# Altium PCB UPCNSL-ABS-FLS-POL_test-v1.0.1.PcbDoc
Units mm, origin at the board's own origin, x right, y up, seen from the top; angles counter-clockwise.
Board outline 109.22 x 119.38 mm, 2 copper layers (Top Layer, Bottom Layer); 142 components, 166 nets, 559 pads, 53 vias.
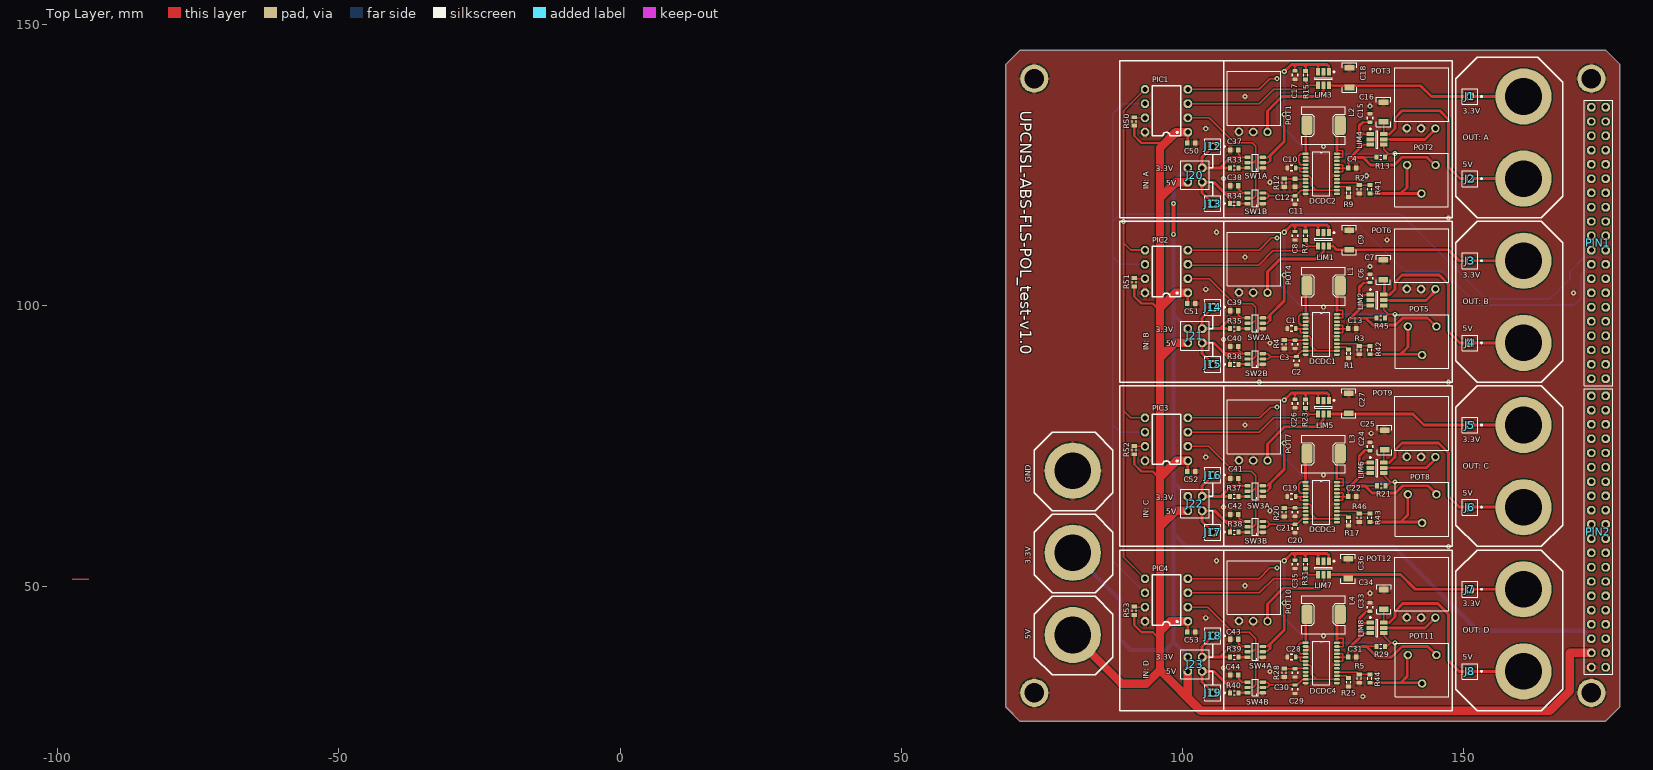
[diagram p0: Top Layer view]
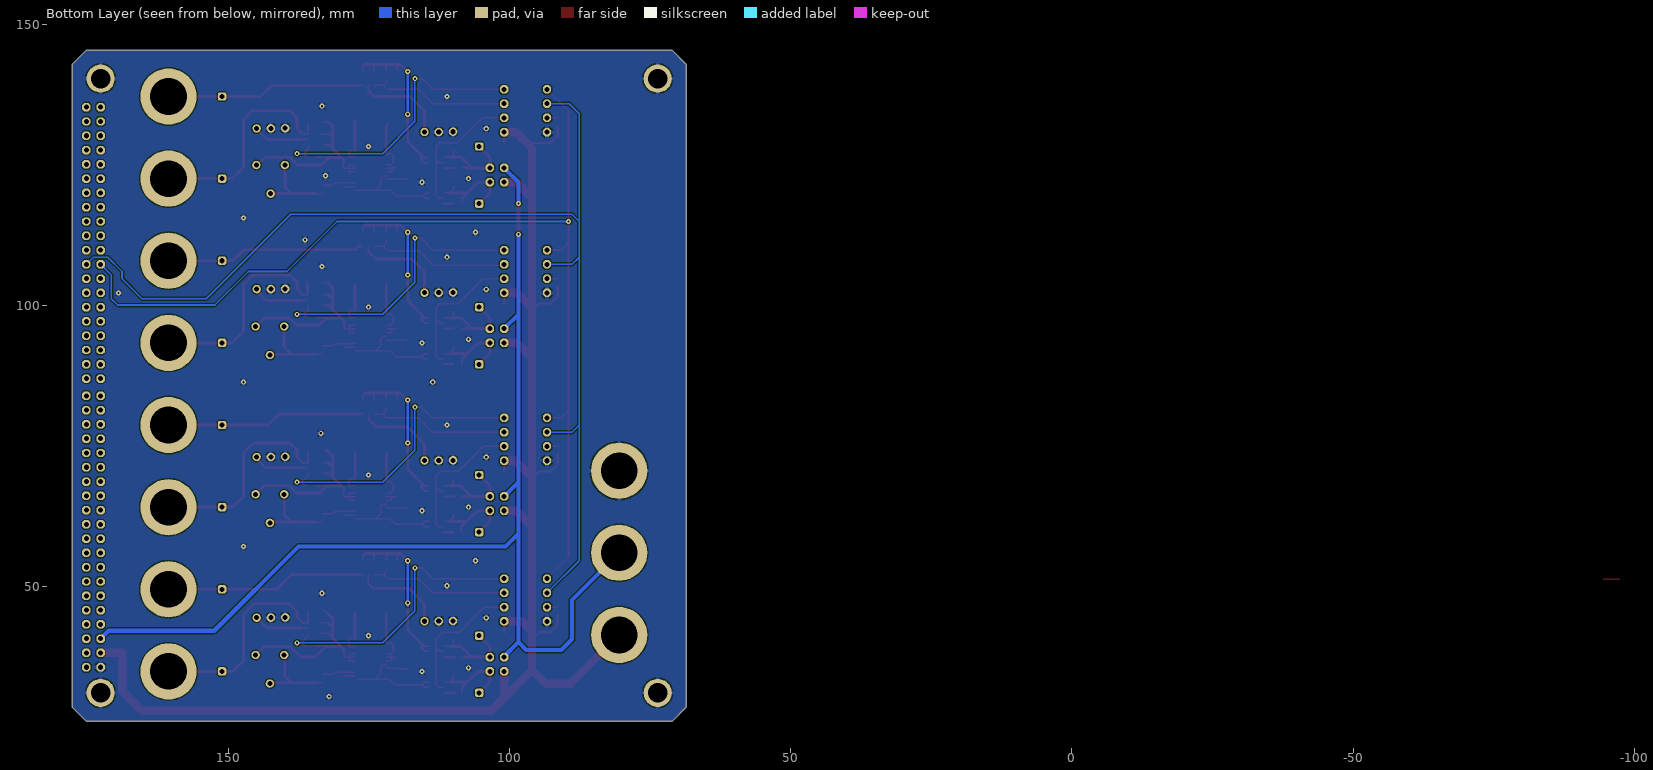
[diagram p1: Bottom Layer view, seen from below]

## Layer stack, top to bottom
Top Solder: solder mask 0.0102, Solder Resist, Dk 3.5
Top Layer: signal copper 0.0356
Dielectric 1: dielectric 0.32, FR-4, Dk 4.8
Bottom Layer: signal copper 0.0356
Bottom Solder: solder mask 0.0102, Solder Resist, Dk 3.5

## Board outline
68.58,28.575 71.12,26.035 175.26,26.035 177.8,28.575 177.8,142.875 175.26,145.415 71.12,145.415 68.58,142.875

## Design rules (kind name [scope] priority, off if disabled: settings)
Clearance Clearance_GND [InNamedPolygon('GND')] p1: gap=0.5
Clearance [All] p2: gap=0.2
PlaneConnect [All] p1: planeconnectstyle=Relief reliefexpansion=0.508 reliefentries=4 reliefconductorwidth=0.75 reliefairgap=0.254
PolygonConnect [All] p1: connectstyle=Relief reliefconductorwidth=0.75 reliefentries=4 polygonreliefangle="90 Angle" airgapwidth=0.254
RoutingVias [All] p1: holewidth=0.711 width=1.27 viastyle="Through Hole" minholewidth=0.711 minwidth=1.27 maxholewidth=0.711 maxwidth=1.27
SolderMaskExpansion [All] p1: expansion=0.102
UnpouredPolygon [All] p1: allowunpoured=FALSE
Width [All] p1: maxlimit=10 minlimit=0.2 preferedwidth=0.2
28 further rules are at their usual default settings.

## Components (designator, comment, footprint, x,y, rotation, side; value= is the part's Value field where it differs from the comment)
C1 "CAP0603" CAP0603 119.38,95.885 r180 top
C2 "CAP0603" CAP0603 120.269,90.17 r270 top
C3 "CAP0603" CAP0603 120.015,93.091 r270 top
C4 "Cap Semi" 1608[0603] 130.175,124.46 r180 top
C6 "CAP0603" CAP0603 133.388,104.825 r90 top
C7 "CAP1206" CAP1206W 135.75,106.35 r90 top
C8 "CAP0603" CAP0603 120.015,112.395 r270 top
C9 "CAP1206" CAP1206W 129.67,111.65 r90 top
C10 "CAP0603" CAP0603 119.38,124.46 r180 top
C11 "CAP0603" CAP0603 120.015,118.745 r270 top
C12 "Cap Semi" 1608[0603] 120.015,121.793 r90 top
C13 "Cap Semi" 1608[0603] 130.175,95.885 r180 top
C15 "CAP0603" CAP0603 133.35,133.35 r90 top
C16 "CAP1206" CAP1206W 135.76,134.41 r90 top
C17 "CAP0603" CAP0603 120.015,140.97 r270 top
C18 "CAP1206" CAP1206W 129.71,140.52 r90 top
C19 "CAP0603" CAP0603 119.38,66.04 r180 top
C20 "CAP0603" CAP0603 120.015,60.325 r270 top
C21 "CAP0603" CAP0603 120.015,63.246 r270 top
C22 "Cap Semi" 1608[0603] 130.175,66.04 r180 top
C24 "CAP0603" CAP0603 133.35,74.93 r90 top
C25 "CAP1206" CAP1206W 135.95,76.08 r90 top
C26 "CAP0603" CAP0603 120.015,82.55 r270 top
C27 "CAP1206" CAP1206W 129.56,82.61 r90 top
C28 "CAP0603" CAP0603 119.38,37.465 r180 top
C29 "CAP0603" CAP0603 120.015,31.75 r270 top
C30 "CAP0603" CAP0603 120.015,34.671 r270 top
C31 "Cap Semi" 1608[0603] 130.175,37.465 r180 top
C33 "CAP0603" CAP0603 133.35,46.355 r90 top
C34 "CAP1206" CAP1206W 135.84,47.75 r90 top
C35 "CAP0603" CAP0603 120.015,53.975 r270 top
C36 "CAP1206" CAP1206W 129.46,53.19 r90 top
C37 "Cap Semi" 1608[0603] 109.22,127.635 r0 top
C38 "Cap Semi" 1608[0603] 109.22,121.285 r0 top
C39 "Cap Semi" 1608[0603] 109.22,99.06 r0 top
C40 "Cap Semi" 1608[0603] 109.22,92.71 r0 top
C41 "Cap Semi" 1608[0603] 109.22,69.215 r180 top
C42 "Cap Semi" 1608[0603] 109.22,62.865 r180 top
C43 "Cap Semi" 1608[0603] 109.22,40.64 r0 top
C44 "Cap Semi" 1608[0603] 109.22,34.29 r0 top
C50 "Cap Semi" 1608[0603] 101.6,128.905 r0 top
C51 "Cap Semi" 1608[0603] 101.6,100.33 r0 top
C52 "Cap Semi" 1608[0603] 101.6,70.485 r0 top
C53 "Cap Semi" 1608[0603] 101.6,41.91 r0 top
DCDC1 "LTC3128" SOP-24 121.92,98.425 r0 top
DCDC2 "LTC3128" SOP-24 121.92,127 r0 top
DCDC3 "LTC3128" SOP-24 121.92,68.58 r0 top
DCDC4 "LTC3128" SOP-24 121.92,40.005 r0 top
J1 "Socket" PIN1 151.13,137.16 r270 top
J2 "Socket" PIN1 151.13,122.555 r270 top
J3 "Socket" PIN1 151.13,107.95 r270 top
J4 "Socket" PIN1 151.13,93.345 r270 top
J5 "Socket" PIN1 151.13,78.74 r270 top
J6 "Socket" PIN1 151.13,64.135 r270 top
J7 "Socket" PIN1 151.13,49.53 r270 top
J8 "Socket" PIN1 151.13,34.925 r270 top
J12 "Socket" PIN1 105.41,128.27 r270 top
J13 "Socket" PIN1 105.41,118.11 r270 top
J14 "Socket" PIN1 105.41,99.695 r270 top
J15 "Socket" PIN1 105.41,89.535 r270 top
J16 "Socket" PIN1 105.41,69.85 r270 top
J17 "Socket" PIN1 105.41,59.69 r270 top
J18 "Socket" PIN1 105.41,41.275 r270 top
J19 "Socket" PIN1 105.41,31.115 r270 top
J20 "Header 2X2" HDR2X2 100.965,124.46 r270 top
J21 "Header 2X2" HDR2X2 100.965,95.885 r270 top
J22 "Header 2X2" HDR2X2 100.965,66.04 r270 top
J23 "Header 2X2" HDR2X2 100.965,37.465 r270 top
L1 "Inductor" MPLC0703R3 121.158,100.076 r0 top
L2 "Inductor" MPLC0703R3 121.158,128.651 r0 top
L3 "Inductor" MPLC0703R3 121.158,70.231 r0 top
L4 "Inductor" MPLC0703R3 121.158,41.656 r0 top
LIM1 "MIC2039" SOT23-6_M 125.095,111.76 r270 top
LIM2 "MIC2039" SOT23-6_M 134.62,100.965 r0 top
LIM3 "MIC2039" SOT23-6_M 125.095,140.335 r270 top
LIM4 "MIC2039" SOT23-6_M 134.62,129.54 r0 top
LIM5 "MIC2039" SOT23-6_M 125.095,81.915 r270 top
LIM6 "MIC2039" SOT23-6_M 134.62,71.12 r0 top
LIM7 "MIC2039" SOT23-6_M 125.095,53.34 r270 top
LIM8 "MIC2039" SOT23-6_M 134.62,42.672 r0 top
PIC1 "SOCOL-8P" SOCOL-8P 97.155,134.62 r180 top
PIC2 "SOCOL-8P" SOCOL-8P 97.155,106.045 r180 top
PIC3 "SOCOL-8P" SOCOL-8P 97.155,76.2 r180 top
PIC4 "SOCOL-8P" SOCOL-8P 97.155,47.625 r180 top
PIN1 "Header 20X2" HDR2X20 172.72,135.255 r270 top
PIN2 "Header 20X2" HDR2X20 172.72,83.93 r270 top
POT1 "POT" POT 107.95,132.08 r0 top
POT2 "POT" POT2 137.414,117.348 r0 top
POT3 "POT" POT 137.795,132.715 r0 top
POT4 "POT" POT 107.95,103.505 r0 top
POT5 "POT" POT2 137.541,88.646 r0 top
POT6 "POT" POT 137.795,104.14 r0 top
POT7 "POT" POT 107.95,73.66 r0 top
POT8 "POT" POT2 137.541,58.801 r0 top
POT9 "POT" POT 137.795,74.295 r0 top
POT10 "POT" POT 107.95,45.085 r0 top
POT11 "POT" POT2 137.541,30.226 r0 top
POT12 "POT" POT 137.795,45.72 r0 top
R1 "Res3" J1-0603 129.54,91.44 r90 top
R2 "Res3" J1-0603 131.445,120.65 r90 top
R3 "Res3" J1-0603 131.445,92.075 r90 top
R4 "Res3" J1-0603 118.11,93.091 r90 top
R5 "Res3" J1-0603 131.445,33.655 r90 top
R7 "Res3" J1-0603 121.92,112.395 r90 top
R9 "Res3" J1-0603 129.54,120.015 r90 top
R12 "Res3" J1-0603 118.11,121.793 r90 top
R13 "Res3" J1-0603 135.255,126.365 r180 top
R15 "Res3" J1-0603 121.92,140.97 r90 top
R17 "Res3" J1-0603 129.54,61.595 r90 top
R20 "Res3" J1-0603 118.11,63.246 r90 top
R21 "Res3" J1-0603 135.37,67.945 r180 top
R23 "Res3" J1-0603 121.92,82.55 r90 top
R25 "Res3" J1-0603 129.54,33.02 r90 top
R28 "Res3" J1-0603 118.11,34.671 r90 top
R29 "Res3" J1-0603 135.255,39.37 r180 top
R31 "Res3" J1-0603 121.92,53.975 r90 top
R33 "Res3" J1-0603 109.22,124.46 r0 top
R34 "Res3" J1-0603 109.19,118.128 r180 top
R35 "Res3" J1-0603 109.22,95.885 r0 top
R36 "Res3" J1-0603 109.22,89.535 r180 top
R37 "Res3" J1-0603 109.22,66.04 r0 top
R38 "Res3" J1-0603 109.22,59.69 r180 top
R39 "Res3" J1-0603 109.22,37.465 r0 top
R40 "Res3" J1-0603 109.22,31.115 r180 top
R41 "Res3" J1-0603 133.35,120.65 r270 top
R42 "Res3" J1-0603 133.35,92.075 r270 top
R43 "Res3" J1-0603 133.35,62.23 r270 top
R44 "Res3" J1-0603 133.35,33.655 r270 top
R45 "Res3" J1-0603 135.255,97.79 r180 top
R46 "Res3" J1-0603 131.445,62.23 r90 top
R50 "Res3" J1-0603 91.44,132.715 r270 top
R51 "Res3" J1-0603 91.44,104.14 r270 top
R52 "Res3" J1-0603 91.44,74.295 r270 top
R53 "Res3" J1-0603 91.44,45.72 r270 top
SW1A "TPS27082L" TPS27081A 114.3,124.46 r90 top
SW1B "TPS27082L" TPS27081A 114.3,118.11 r90 top
SW2A "TPS27082L" TPS27081A 114.3,95.885 r90 top
SW2B "TPS27082L" TPS27081A 114.3,89.535 r90 top
SW3A "TPS27082L" TPS27081A 114.3,66.04 r90 top
SW3B "TPS27082L" TPS27081A 114.3,59.69 r90 top
SW4A "TPS27082L" TPS27081A 114.3,37.465 r90 top
SW4B "TPS27082L" TPS27081A 114.3,31.115 r90 top

## Footprints (in the part's own frame and the unit in brackets; to place one, negate y for a bottom-side part, rotate by r counter-clockwise, add the part's x,y. Pads: shape width x height; smd on the part's side, far side on the other; paste and mask are expansions set on the pad)
1608[0603] [mm] "Chip Capacitor, Body 1.6x0.8mm, IPC High Density"
  rect 0.8x0.9 smd: 1(-0.7,0) 2(0.7,0)
  body extent -0.87,-0.48 0.87,0.48, height 1.3
CAP0603 [mm] "Capacitor Chip Inductor, Body 0.6x0.3mm, IPC High Density"
  rrect50% 0.6x0.9 smd: 1(-0.75,0) 2(0.75,0)
  silkscreen extent -0.2,-0.5 0.2,0.5, body extent -0.76,-0.38 0.76,0.38, height 0.76
CAP1206W [mm] "capacitor 1206 wave soldering"
  rect 1x1.7 smd: 1(-1.75,0) 2(1.75,0)
  silkscreen extent -2.6,-1.27 2.6,1.27, body extent -1.6,-0.8 1.6,0.8, height 1
HDR2X2 [mm] "Connector; Header; 2x2 Position"
  oct 1.5x1.5 hole 0.9: 1(0,0) 2(0,2.54) 3(2.54,0) 4(2.54,2.54)
  silkscreen extent -1.27,-1.27 3.81,3.81
HDR2X20 [mm] "Connector; Header; 20x2 Position"
  oct 1.5x1.5 hole 0.9: 1(0,0) 2(0,2.54) 3(2.54,0) 4(2.54,2.54) 5(5.08,0) 6(5.08,2.54) 7(7.62,0) 8(7.62,2.54) 9(10.16,0) 10(10.16,2.54) 11(12.7,0) 12(12.7,2.54) 13(15.24,0) 14(15.24,2.54) 15(17.78,0) 16(17.78,2.54) 17(20.32,0) 18(20.32,2.54) 19(22.86,0) 20(22.86,2.54) 21(25.4,0) 22(25.4,2.54) 23(27.94,0) 24(27.94,2.54) 25(30.48,0) 26(30.48,2.54) 27(33.02,0) 28(33.02,2.54) 29(35.56,0) 30(35.56,2.54) 31(38.1,0) 32(38.1,2.54) 33(40.64,0) 34(40.64,2.54) 35(43.18,0) 36(43.18,2.54) 37(45.72,0) 38(45.72,2.54) 39(48.26,0) 40(48.26,2.54)
  silkscreen extent -1.27,-1.27 49.53,3.81
J1-0603 [mm] "Chip Resistor, Body 1.6x0.8mm, IPC High Density"
  rect 0.7x0.9 smd: 1(-0.75,0) 2(0.75,0)
  silkscreen extent -0.2,-0.35 0.2,0.35, body extent -0.85,-0.48 0.85,0.48, height 0.9
MPLC0703R3 [mm] "INDUCTOR, High power"
  rrect50% 2x3.5 smd: 1(1,3.407) 2(6.9,3.407)
  silkscreen extent 0.07,0 7.82,6.7
PIN1 [mm] "Connector; Plug"
  rrect50% 1.5x1.5 hole 0.9: 1(0,0)
  silkscreen extent -1.4,-1.4 1.4,2.18
POT [mm]
  round 1.5 hole 0.9: 1(7.18,-1.238) 2(4.651,-1.233) 3(2.104,-1.194)
  silkscreen extent 0,0 9.53,9.53
POT2 [mm]
  round 1.5 hole 0.9: 1(7.62,7.62) 2(5.08,2.54) 3(2.54,7.62)
  silkscreen extent 0.32,0.2 9.85,9.73
SOCOL-8P [mm]
  oct 1.5x1.5 hole 0.9: 1(-3.81,3.81) 2(-3.81,1.27) 3(-3.81,-1.27) 4(-3.81,-3.81) 5(3.81,-3.81) 6(3.81,-1.27) 7(3.81,1.27) 8(3.81,3.81)
  silkscreen extent -2.54,-4.48 2.54,4.48
SOP-24 [mm]
  rect 1.05x0.45 smd: 1(0,0)
  oval 1.05x0.45 smd: 2(0,-0.65) 3(0,-1.3) 4(0,-1.95) 5(0,-2.6) 6(0,-3.25) 7(0,-3.9) 8(0,-4.55) 9(0,-5.2) 10(0,-5.85) 11(0,-6.5) 12(0,-7.15) 13(5.55,-7.15) 14(5.55,-6.5) 15(5.55,-5.85) 16(5.55,-5.2) 17(5.55,-4.55) 18(5.55,-3.9) 19(5.55,-3.25) 20(5.55,-2.6) 21(5.55,-1.95) 22(5.55,-1.3) 23(5.55,-0.65) 24(5.55,0)
  rrect50% 2.74x3.25 on Top Solder: 2(2.775,-3.575)
  silkscreen extent 1.26,-7.48 4.29,0.33
SOT23-6_M [mm] "SOT23, 6-Leads, Body 2.9x1.6mm, Pitch 0.95mm, Lead Span 2.7mm, IPC Low Density"
  rect 1.3x0.7 smd: 1(-1.2,0.95) 2(-1.2,0) 3(-1.2,-0.95) 4(1.2,-0.95) 5(1.2,0) 6(1.2,0.95)
  silkscreen extent -1.32,-1.55 0.15,1.98, body extent -0.9,-1.55 0.9,1.55, height 1.45
TPS27081A [mm] "POL"
  rrect50% 0.6x1.1 smd: 1(0,0) 2(0.95,0) 3(1.9,0) 4(1.9,2.7) 5(0.95,2.7) 6(0,2.7)
  silkscreen extent -0.55,0.85 2.45,1.85

## Part data
C1 C2 C3 C6 C8 C10 C11 C15 C17 C19 C20 C21 C24 C26 C28 C29 C30 C33 C35: "Capacitor"
C4 C12 C13 C22 C31 C37 C38 C39 C40 C41 C42 C43 C44 C50 C51 C52 C53: "Capacitor (Semiconductor SIM Model)"
C7 C9 C16 C18 C25 C27 C34 C36: library part CAP0603, "Capacitor"
DCDC1 DCDC2 DCDC3 DCDC4: library part Component_1
J20 J21 J22 J23: "Header, 2-Pin, Dual row"
PIN1 PIN2: "Header, 20-Pin, Dual row"
POT1 POT2 POT3 POT4 POT5 POT6 POT7 POT8 POT9 POT10 POT11 POT12: library part component_1
R1 R2 R3 R4 R5 R7 R9 R12 R13 R15 R17 R20 R21 R23 R25 R28 R29 R31 R33 R34 R35 R36 R37 R38 R39 R40 R41 R42 R43 R44 R45 R46 R50 R51 R52 R53: "Resistor"

## Free pads (board coordinates)
  round 10 hole 6.5: 24(160.655,137.16) 25(160.655,122.555) 26(160.655,107.95) 27(160.655,93.345) 28(160.655,78.74) 29(160.655,64.135) 30(160.655,49.53) 31(160.655,34.925) 32(80.518,41.402) 33(80.518,56.007) 34(80.518,70.612)
  round 5 hole 3.5: ""(73.66,31.115) ""(73.66,140.335) ""(172.72,31.115) ""(172.72,140.335)

## Via types
v1: diameter 0.91/0.91 (per signal layer), hole 0.4, Top Layer to Bottom Layer, 53 vias

## Nets (pads, with @x,y where several pads share a name; then routed paths per layer and width w, separated by ;. In a path a pad name is that pad's centre, name@x,y a point inside that pad or via, vN(x,y) a via of type N, cw(c..) or ccw(c..) an arc to the next point about the centre after c; other vN are vias at no path point)
A0: PIN2.31
A1: PIN2.32
A2: PIN2.29
A3: PIN2.30
A4: PIN2.27
A5: PIN2.28
A6: PIN2.25
A7: PIN2.26
A8: PIN2.23
A9: PIN2.24
A10: PIN2.21
A11: PIN2.22
A12: PIN2.19
A13: PIN2.20
A14: PIN2.17
A15: PIN2.18
AREF: PIN1.1
COMM0_RX0: PIN1.16
COMM1_TX0: PIN1.15
COMM14_TX3: PIN1.17
COMM15_RX3: PIN1.18
COMM16_TX2: PIN1.19
COMM17_RX2: PIN1.20
COMM18_TX1: PIN1.21
COMM19_RX1: PIN1.22
COMM20_SDA: PIC1.5 PIC2.5 PIC3.5 PIC4.5 PIN1.23 | length 193.6
  Top Layer w0.3: 89.535,81.28 90.805,80.01 PIC3.5 ; 89.535,111.125 90.805,109.855 PIC2.5 ; PIC4.5 89.535,55.245 89.535,134.62 PIC1.5
  Bottom Layer w0.3: v1(89.535,114.935) 130.695,114.935 139.585,106.045 146.431,106.045 152.4,100.076 169.672,100.076 170.815,101.219 170.815,105.41 PIN1.23
COMM21_SCL: PIC1.6 PIC2.6 PIC3.6 PIC4.6 PIN1.24 | length 205.2
  Bottom Layer w0.3: 87.63,114.935 88.9,116.205 138.938,116.205 153.924,101.219 165.354,101.219 168.91,104.775 168.91,106.045 171.45,108.585 173.99,108.585 PIN1.24 ; PIC4.6 87.63,54.61 87.63,78.74 ; PIC3.6 88.9,77.47 87.63,78.74 ; PIC2.6 88.9,107.315 87.63,108.585 ; PIC1.6 89.408,135.89 87.63,134.112 87.63,108.585 ; 87.63,78.74 87.63,108.585
D22: PIN1.25
D23: PIN1.26
D24: PIN1.27
D25: PIN1.28
D26: PIN1.29
D27: PIN1.30
D28: PIN1.31
D29: PIN1.32
D30: PIN1.33
D31: PIN1.34
D32: PIN1.35
D33: PIN1.36
D34: PIN1.37
D35: PIN1.38
D36: PIN1.39
D37: PIN1.40
D38: PIN2.1
D39: PIN2.2
D40: PIN2.3
D41: PIN2.4
D42: PIN2.5
D43: PIN2.6
D44: PIN2.7
D45: PIN2.8
D46: PIN2.9
D47: PIN2.10
D48: PIN2.11
D49: PIN2.12
ENABLE1: PIC1.2 SW1A.5 SW1B.5 | length 26.1
  Top Layer w0.254: PIC1.2 104.775,133.35 109.22,128.905 112.395,128.905 113.03,128.27 113.03,125.857 ; SW1A.5 112.583,125.41 113.03,125.857 ; SW1B.5@111.697,119.078 112.601,119.078 113.03,119.507 113.03,125.857
ENABLE2: PIC2.2 SW2A.5 SW2B.5 | length 26.1
  Top Layer w0.254: PIC2.2 104.775,104.775 109.22,100.33 112.395,100.33 113.03,99.695 113.03,97.409 ; SW2A.5 112.456,96.835 113.03,97.409 ; SW2B.5@111.697,90.503 112.601,90.503 113.03,90.932 113.03,97.409
ENABLE3: PIC3.2 SW3A.5 SW3B.5 | length 26
  Top Layer w0.254: PIC3.2 104.648,74.93 109.093,70.485 112.268,70.485 113.03,69.723 113.03,67.564 ; SW3A.5 112.456,66.99 113.03,67.564 ; SW3B.5@111.697,60.658 112.601,60.658 113.03,61.087 113.03,67.564
ENABLE4: PIC4.2 SW4A.5 SW4B.5 | length 25.8
  Top Layer w0.254: PIC4.2 104.521,46.355 108.966,41.91 111.887,41.91 113.03,40.767 113.03,38.989 ; SW4A.5@111.6,38.481 112.522,38.481 113.03,38.989 ; SW4B.5@111.697,32.083 112.601,32.083 113.03,32.512 113.03,38.989
GND: C1.2 C2.2 C3.2 C4.1 C6.2 C7.2 C8.2 C9.2 C10.2 C11.2 C12.1 C13.1 C15.2 C16.2 C17.2 C18.2 C19.2 C20.2 C21.2 C22.1 C24.2 C25.2 C26.2 C27.2 C28.2 C29.2 C30.2 C31.1 C33.2 C34.2 C35.2 C36.2 C37.1 C38.1 C39.1 C40.1 C41.2 C42.2 C43.1 C44.1 C50.2 C51.2 C52.2 C53.2 DCDC1.2@121.92,97.775 DCDC1.3 DCDC1.12 DCDC1.18 DCDC2.2@121.92,126.35 DCDC2.3 DCDC2.12 DCDC2.18 DCDC3.2@121.92,67.93 DCDC3.3 DCDC3.12 DCDC3.18 DCDC4.2@121.92,39.355 DCDC4.3 DCDC4.12 DCDC4.18 LIM1.2 LIM2.2 LIM3.2 LIM4.2 LIM5.2 LIM6.2 LIM7.2 LIM8.2 pad. pad.34 PIC1.8 PIC2.8 PIC3.8 PIC4.8 PIN2.39 POT1.2 POT1.3 POT3.2 POT3.3 POT4.2 POT4.3 POT6.2 POT6.3 POT7.2 POT7.3 POT9.2 POT9.3 POT10.2 POT10.3 POT12.2 POT12.3 R1.1 R2.1 R3.1 R4.1 R5.1 R9.1 R12.1 R17.1 R20.1 R25.1 R28.1 R46.1 SW1A.1 SW1B.1 SW2A.1 SW2B.1 SW3A.1 SW3B.1 SW4A.1 SW4B.1
  other v1: 132.08,30.48 115.57,34.925 107.315,35.56 125.095,41.275 104.14,44.45 133.34,48.82 111.125,50.165 106.045,54.61 147.32,57.15 115.57,63.5 107.315,64.135 125.095,69.85 104.14,73.025 133.56,77.26 111.125,78.74 113.665,86.36 147.32,86.36 115.57,93.345 107.315,93.98 125.095,99.695 169.545,102.235 104.14,102.87 133.34,106.92 111.125,108.585 136.37,111.67 106.045,113.03 147.32,115.57 115.57,121.92 107.315,122.555 132.715,123.063 125.095,128.27 104.14,131.445 133.34,135.44 111.125,137.16
IN-A_3.3V: C37.2 J12.1 J20.2 R33.1 SW1A.4 | length 16.4
  Top Layer w0.254: 107.696,124.46 R33.1 ; C37.2 109.92,126.935 110.495,126.36 SW1A.4
  Top Layer w0.5: J12.1@105.151,128.011 103.505,126.365 J20.2 107.696,124.46 ; 106.68,124.46 108.58,126.36 110.495,126.36
IN-A_5V: C38.2 J13.1 J20.4 R34.2 SW1B.4 | length 17.3
  Top Layer w0.254: R34.2 108.44,119.107 ; C38.2 109.92,120.712 110.617,120.015 110.622,120.01 SW1B.4
  Top Layer w0.5: J13.1 103.505,120.015 J20.4 105.627,121.92 107.532,120.015 ; 108.421,119.126 107.532,120.015 ; 110.617,120.015 107.532,120.015
IN-B_3.3V: C39.2 J14.1 J21.2 R35.1 SW2A.4 | length 16.4
  Top Layer w0.254: 107.696,95.885 R35.1 ; C39.2 109.92,98.36 110.495,97.785 SW2A.4
  Top Layer w0.5: J14.1@105.151,99.436 103.505,97.79 J21.2 107.696,95.885 ; 106.68,95.885 108.58,97.785 110.495,97.785
IN-B_5V: C40.2 J15.1 J21.4 R36.2 SW2B.4 | length 17.3
  Top Layer w0.254: R36.2@108.44,89.553 108.44,90.532 ; C40.2 109.92,92.137 110.617,91.44 110.622,91.435 SW2B.4
  Top Layer w0.5: J15.1 103.505,91.44 J21.4 105.627,93.345 107.532,91.44 ; 108.421,90.551 107.532,91.44 ; 110.617,91.44 107.532,91.44
IN-C_3.3V: C41.1 J16.1 J22.2 R37.1 SW3A.4 | length 16.4
  Top Layer w0.254: 107.823,66.04 R37.1@108.597,66.04 ; C41.1@110.047,69.215 110.047,68.515 110.622,67.94 SW3A.4@111.727,67.94
  Top Layer w0.5: J22.2 103.505,67.945 J16.1@105.151,69.591 ; J22.2@103.632,66.04 107.823,66.04 ; 106.807,66.04 108.707,67.94 110.622,67.94
IN-C_5V: C42.1 J17.1 J22.4 R38.2 SW3B.4 | length 17.3
  Top Layer w0.254: R38.2@108.567,59.708 108.567,60.687 ; C42.1@110.047,62.865 110.047,62.292 110.744,61.595 110.749,61.59 SW3B.4@111.727,61.59
  Top Layer w0.5: J22.4 103.505,61.595 J17.1 ; J22.4@103.632,63.5 105.754,63.5 107.659,61.595 ; 108.548,60.706 107.659,61.595 ; 110.744,61.595 107.659,61.595
IN-D_3.3V: C43.2 J18.1 J23.2 R39.1 SW4A.4 | length 16.4
  Top Layer w0.254: 107.696,37.465 R39.1 ; C43.2 109.92,39.94 110.495,39.365 SW4A.4
  Top Layer w0.5: J18.1@105.151,41.016 103.505,39.37 J23.2 107.696,37.465 ; 106.68,37.465 108.58,39.365 110.495,39.365
IN-D_5V: C44.2 J19.1 J23.4 R40.2 SW4B.4 | length 17.3
  Top Layer w0.254: R40.2@108.44,31.133 108.44,32.112 ; C44.2 109.92,33.717 110.617,33.02 110.622,33.015 SW4B.4
  Top Layer w0.5: J19.1 103.505,33.02 J23.4 105.627,34.925 107.532,33.02 ; 108.421,32.131 107.532,33.02 ; 110.617,33.02 107.532,33.02
IN_3.3V: J20.1 J21.1 J22.1 J23.1 pad.33 PIN2.35 | length 208
  Top Layer w0.75: v1(98.425,112.649) v1(98.425,118.11)
  Bottom Layer w0.75: pad.33 88.9,47.625 88.9,40.64 90.805,38.735 97.028,38.735 98.425,40.132 ; 98.425,59.436 100.711,57.15 137.541,57.15 152.527,42.164 171.306,42.164 PIN2.35 ; 98.425,68.58 J22.1 ; 98.425,98.425 J21.1 ; v1(98.425,112.649) 98.425,40.132 ; v1(98.425,118.11) 98.425,121.92 J20.1 ; J23.1@101.028,37.529 98.425,40.132
IN_5V: C50.1 C51.1 C52.1 C53.1 J20.3 J21.3 J22.3 J23.3 pad.32 PIC1.1 PIC2.1 PIC3.1 PIC4.1 PIN2.37 R50.2 R51.2 R52.2 R53.2 | length 288.3
  Top Layer w0.254: C50.1@100.965,128.97 C50.1@101.03,128.905
  Top Layer w0.4: R53.2 91.44,43.18 92.71,41.91 94.742,41.91 96.012,40.64 ; R52.2 91.44,71.755 92.71,70.485 94.742,70.485 96.012,69.215 ; R51.2 91.44,101.6 92.71,100.33 94.742,100.33 96.012,99.06 ; R50.2@91.44,131.838 91.44,130.175 92.71,128.905 96.901,128.905 ; C53.1@100.965,41.848 PIC4.1@100.965,43.688 ; C52.1@100.965,70.423 PIC3.1@100.965,72.263 ; C51.1@100.965,100.268 PIC2.1 ; C50.1@100.965,128.97 PIC1.1
  Top Layer w1.5: pad.32@84.391,41.402 pad.32 89.154,32.766 93.599,32.766 96.012,35.179 ; 96.012,42.037 97.79,43.815 PIC4.1 ; 96.012,99.568 98.679,102.235 PIC2.1 ; 96.012,119.126 98.806,121.92 J20.3 ; 96.075,60.77 98.806,63.5 J22.3 ; 96.075,69.532 98.933,72.39 PIC3.1 ; 96.393,91.059 98.679,93.345 J21.3 ; 100.965,30.226 J23.3@100.965,34.798 ; PIC1.1 98.806,130.81 96.012,128.016 96.012,35.179 ; PIN2.37@172.71,38.22 168.91,38.22 168.91,31.496 165.354,27.94 103.251,27.94 96.012,35.179
IOREF0: PIN2.34
IOREF1: PIN2.36
LU1A: LIM3.4 PIC1.3 R15.1 | length 25.8
  Top Layer w0.254: PIC1.3 113.665,135.89 116.205,138.43 121.793,138.43 122.492,139.129 121.92,139.7 R15.1 ; 122.498,139.135 LIM3.4
LU1B: LIM4.4 PIC1.4 R13.1 | length 51.8
  Top Layer w0.254: PIC1.4 113.665,138.43 115.57,140.335 v1(116.84,140.335) ; LIM4.4@135.42,128.32 LIM4.4@135.547,128.447 ; LIM4.4 135.82,127.82 136.64,127 ; R13.1 136.64,127 ; v1(137.795,127) 136.64,127
  Bottom Layer w0.254: v1(116.84,140.335) 116.84,132.715 122.555,127 v1(137.795,127)
LU2A: LIM1.4 PIC2.3 R7.1 | length 26
  Top Layer w0.254: PIC2.3@100.838,107.188 113.538,107.188 116.078,109.728 121.666,109.728 122.047,110.109 122.061,110.109 122.498,110.547 121.92,111.125 R7.1 ; 122.498,110.56 LIM1.4
LU2B: LIM2.4 PIC2.4 R45.1 | length 51.9
  Top Layer w0.254: PIC2.4 113.665,109.855 115.824,112.014 v1(116.84,112.014) ; LIM2.4 135.82,99.245 136.64,98.425 ; R45.1 136.64,98.425 ; v1(137.795,98.425) 136.64,98.425
  Bottom Layer w0.254: v1(116.84,112.014) 116.84,104.14 122.555,98.425 v1(137.795,98.425)
LU3A: LIM5.4 PIC3.3 R23.1 | length 25.9
  Top Layer w0.254: PIC3.3 113.665,77.47 116.205,80.01 121.92,80.01 122.568,80.658 LIM5.4@124.124,80.658 ; R23.1 121.92,81.28 122.555,80.645
LU3B: LIM6.4 PIC3.4 R21.1 | length 51.7
  Top Layer w0.254: PIC3.4 113.792,80.01 115.697,81.915 v1(116.84,81.915) ; LIM6.4@135.89,70.17 135.89,69.723 137.033,68.58 ; R21.1@136.017,67.945 136.398,67.945 137.033,68.58 ; v1(137.795,68.58) 137.033,68.58
  Bottom Layer w0.254: v1(116.84,81.915) 116.84,74.295 122.555,68.58 v1(137.795,68.58)
LU4A: LIM7.4 PIC4.3 R31.1 | length 26
  Top Layer w0.254: PIC4.3@100.838,48.514 100.838,48.768 PIC4.3 113.665,48.895 116.205,51.435 121.666,51.435 122.364,52.133 121.92,52.578 R31.1@121.92,52.971 ; 122.364,52.14 LIM7.4
LU4B: LIM8.4 PIC4.4 R29.1 | length 51.7
  Top Layer w0.254: PIC4.4 113.665,51.435 115.57,53.34 v1(116.84,53.34) ; LIM8.4@135.89,41.595 135.89,41.148 137.033,40.005 ; R29.1@136.017,39.37 136.398,39.37 137.033,40.005 ; v1(137.795,40.005) 137.033,40.005
  Bottom Layer w0.254: v1(116.84,53.34) 116.84,45.72 122.555,40.005 v1(137.795,40.005)
MISO: PIN2.13
MOSI: PIN2.14
NetC1_1: C1.1 DCDC1.5 DCDC1.6 | length 3.4
  Top Layer w0.254: C1.1 120.146,95.869 120.95,95.869 ; DCDC1.5@121.876,95.869 120.95,95.869 ; DCDC1.6 120.955,95.175 120.95,95.17 120.95,95.869
NetC2_1: C2.1 DCDC1.7 DCDC1.11 DCDC1.14 SW2B.2 SW2B.3 | length 18.7
  Top Layer w0.254: SW2B.2@114.554,90.485 115.25,90.485 115.685,90.92 ; SW2B.3@114.554,91.435 115.17,91.435 115.685,90.92 ; C2.1@120.257,90.932 121.25,91.925 DCDC1.11 123.825,91.925 ; C2.1@120.372,90.92 115.685,90.92 ; DCDC1.7 122.518,94.525 122.936,94.107 122.936,92.814 123.825,91.925 ; DCDC1.14 123.825,91.925
NetC3_1: C3.1 DCDC1.8 R4.2 | length 3.8
  Top Layer w0.254: R4.2 C3.1 121.886,93.841 DCDC1.8
NetC4_2: C4.2 C15.1 DCDC2.19 DCDC2.20 DCDC2.21 LIM4.1 LIM4.3 POT2.1 R13.2 | length 39.4
  Top Layer w0.254: DCDC2.19 128.55,123.75 128.55,124.4 ; DCDC2.20 128.55,124.4 ; DCDC2.21 128.55,125.05 128.55,124.4 ; 129.54,125.476 129.54,124.525 C4.2 129.415,124.4 128.55,124.4 ; 132.08,128.574 LIM4.3@133.134,128.574 ; 132.08,130.479 LIM4.1@133.458,130.479 ; 132.08,132.588 133.163,132.588 C15.1@133.193,132.618 ; 132.157,126.288 132.234,126.365 R13.2
  Top Layer w0.5: 129.54,125.476 129.54,125.984 131.445,127.889 ; 129.921,126.288 132.157,126.288 133.477,124.968 137.668,124.968 139.065,126.365 143.471,126.365 POT2.1@145.072,124.764 ; 131.445,129.921 132.08,130.556 ; 132.08,128.524 131.445,127.889 ; 132.08,132.588 131.445,131.953 131.445,127.889
NetC6_1: C6.1 C13.2 DCDC1.19 DCDC1.20 DCDC1.21 LIM2.1 LIM2.3 POT5.1 R45.2 | length 39.7
  Top Layer w0.254: DCDC1.19 128.545,95.175 128.545,95.825 ; DCDC1.20 128.545,95.825 ; DCDC1.21 128.545,96.475 128.545,95.825 ; 129.413,96.901 129.413,95.947 129.291,95.825 128.545,95.825 ; 132.08,99.949 132.146,100.015 LIM2.3 ; 132.143,101.79 132.268,101.915 LIM2.1 ; 132.207,104.013 132.269,104.075 C6.1 ; 132.665,97.713 132.742,97.79 R45.2 ; LIM2.3@132.88,99.999 LIM2.3@133.261,99.999
  Top Layer w0.5: 129.413,96.901 129.413,97.282 129.844,97.713 ; 131.445,101.092 132.143,101.79 ; 132.08,99.949 131.445,99.314 ; 132.207,104.013 131.445,103.251 131.445,99.314 ; POT5.1@145.199,96.189 143.598,97.79 139.192,97.79 137.922,96.52 133.858,96.52 132.665,97.713 129.844,97.713 ; 129.844,97.713 131.445,99.314
NetC8_1: C8.1 LIM1.1 LIM1.3 R7.2 SW2A.2 SW2A.3 | length 33.5
  Top Layer w0.254: SW2A.2 115.062,96.835 115.062,96.852 115.57,97.36 ; SW2A.3 115.057,97.785 115.57,98.298 ; C8.1 120.015,113.919 ; R7.2 121.92,113.919 ; LIM1.3@124.124,112.903 124.124,113.964 ; LIM1.1@126.024,112.903 126.024,114.006
  Top Layer w0.5: 115.57,97.36 115.57,98.298 118.11,100.838 v1(118.11,105.41) ; v1(118.11,113.03) 119.38,114.3 119.634,114.3 ; 120.015,113.919 119.634,114.3 ; 121.92,113.919 121.539,114.3 ; 124.119,114.006 123.825,114.3 ; 126.024,114.006 125.73,114.3 123.825,114.3 ; 119.634,114.3 121.539,114.3 ; 121.539,114.3 123.825,114.3
  Bottom Layer w0.5: v1(118.11,105.41) v1(118.11,113.03)
NetC10_1: C10.1 DCDC2.5 DCDC2.6 | length 3.5
  Top Layer w0.254: C10.1 120.9,124.46 ; DCDC2.6 120.9,123.75 120.9,124.46 ; DCDC2.5 120.96,124.4 120.9,124.46
NetC11_1: C11.1 DCDC2.7 DCDC2.11 DCDC2.14 SW1B.2 SW1B.3 | length 18.8
  Top Layer w0.254: SW1B.2 114.996,119.06 115.431,119.495 ; SW1B.3 114.916,120.01 115.431,119.495 ; DCDC2.7 121.964,123.056 122.471,123.056 122.936,122.591 122.936,121.389 123.825,120.5 ; DCDC2.14 123.825,120.5 ; 115.431,119.495 120.13,119.495 121.135,120.5 DCDC2.11 123.825,120.5
NetC12_2: C12.2 DCDC2.8 R12.2 | length 3.7
  Top Layer w0.254: R12.2 C12.2@119.965,122.543 ; C12.2@120.058,122.45 DCDC2.8
NetC17_1: C17.1 LIM3.1 LIM3.3 R15.2 SW1A.2 SW1A.3 | length 33.2
  Top Layer w0.254: SW1A.2@114.465,125.24 114.635,125.41 115.25,125.41 115.608,125.768 ; SW1A.3@114.541,126.492 114.795,126.238 115.082,126.238 115.481,126.637 ; C17.1 120.015,142.494 ; R15.2 121.92,142.494 ; LIM3.3@124.124,141.478 124.124,142.539 ; LIM3.1@126.024,141.478 126.024,142.581
  Top Layer w0.5: 115.608,125.768 115.608,126.657 118.11,129.159 v1(118.11,133.985) ; v1(118.11,141.605) 119.38,142.875 119.634,142.875 ; 120.015,142.494 119.634,142.875 ; 121.92,142.494 121.539,142.875 ; 124.119,142.581 123.825,142.875 ; 126.024,142.581 125.73,142.875 123.825,142.875 ; 119.634,142.875 121.539,142.875 ; 121.539,142.875 123.825,142.875
  Bottom Layer w0.5: v1(118.11,133.985) v1(118.11,141.605)
NetC19_1: C19.1 DCDC3.5 DCDC3.6 | length 3.4
  Top Layer w0.254: C19.1 120.19,65.98 120.99,65.98 ; DCDC3.6 121,65.33 120.99,65.34 120.99,65.98 ; DCDC3.5 120.99,65.98
NetC20_1: C20.1 DCDC3.7 DCDC3.11 DCDC3.14 SW3B.2 SW3B.3 | length 19.1
  Top Layer w0.254: SW3B.2 115.123,60.64 115.57,61.087 ; SW3B.3 115.067,61.59 115.57,61.087 ; DCDC3.7 121.964,64.636 122.689,64.636 122.936,64.389 122.936,62.969 123.825,62.08 ; DCDC3.14 123.825,62.08 ; 115.57,61.087 120.305,61.087 121.298,62.08 DCDC3.11 123.825,62.08
NetC21_1: C21.1 DCDC3.8 R20.2 | length 3.8
  Top Layer w0.254: R20.2 C21.1 DCDC3.8@121.886,63.996
NetC22_2: C22.2 C24.1 DCDC3.19 DCDC3.20 DCDC3.21 LIM6.1 LIM6.3 POT8.1 R21.2 | length 39.5
  Top Layer w0.254: DCDC3.19 128.55,65.33 128.55,65.97 ; DCDC3.20 128.56,65.98 ; DCDC3.21 127.51,66.67 128.54,66.67 ; 128.56,66.65 128.56,65.98 ; C22.2@129.415,65.98 128.56,65.98 ; C22.2 129.475,66.867 ; 132.08,70.104 132.146,70.17 LIM6.3 ; 132.143,71.945 132.268,72.07 LIM6.1 ; 132.452,74.25 C24.1@132.948,74.25 ; 132.518,67.888 132.575,67.945 R21.2 ; LIM6.3@132.88,70.154 LIM6.3@133.261,70.154
  Top Layer w0.5: 129.475,66.867 129.475,67.499 129.864,67.888 132.518,67.888 133.731,66.675 137.922,66.675 139.192,67.945 143.686,67.945 POT8.1@145.267,66.364 ; 129.882,67.906 131.445,69.469 ; 131.445,71.247 132.143,71.945 ; 132.08,70.104 131.445,69.469 ; 132.452,74.25 131.445,73.243 131.445,69.469
NetC26_1: C26.1 LIM5.1 LIM5.3 R23.2 SW3A.2 SW3A.3 | length 33.2
  Top Layer w0.254: SW3A.2 115.057,66.99 115.481,67.414 ; SW3A.3 115.057,67.94 115.481,68.364 ; C26.1 120.015,84.074 ; R23.2 121.92,84.074 ; LIM5.3@124.124,83.058 124.124,84.119 ; LIM5.1@126.024,83.058 126.024,84.161
  Top Layer w0.5: 115.57,67.564 115.57,68.326 118.11,70.866 v1(118.11,75.565) ; v1(118.11,83.185) 119.38,84.455 119.634,84.455 ; 120.015,84.074 119.634,84.455 ; 121.92,84.074 121.539,84.455 ; 124.119,84.161 123.825,84.455 ; 126.024,84.161 125.73,84.455 123.825,84.455 ; 119.634,84.455 121.539,84.455 ; 121.539,84.455 123.825,84.455
  Bottom Layer w0.5: v1(118.11,75.565) v1(118.11,83.185)
NetC28_1: C28.1 DCDC4.5 DCDC4.6 | length 3.5
  Top Layer w0.254: C28.1 120.19,37.405 120.92,37.405 ; DCDC4.6 120.935,36.755 120.92,36.77 120.92,37.405 ; DCDC4.5 120.92,37.405
NetC29_1: C29.1 DCDC4.7 DCDC4.11 DCDC4.14 SW4B.2 SW4B.3 | length 18.6
  Top Layer w0.254: SW4B.2 115.123,32.065 115.57,32.512 ; SW4B.3 115.067,33.015 115.57,32.512 ; DCDC4.7 121.964,36.061 122.689,36.061 122.936,35.814 122.936,34.417 123.848,33.505 126.97,33.505 DCDC4.14@127.014,33.461 ; 123.825,33.505 DCDC4.11 121.389,33.505 120.396,32.512 115.57,32.512
NetC30_1: C30.1 DCDC4.8 R28.2 | length 3.8
  Top Layer w0.254: R28.2 C30.1 120.049,35.455 DCDC4.8
NetC31_2: C31.2 C33.1 DCDC4.19 DCDC4.20 DCDC4.21 LIM8.1 LIM8.3 POT11.1 R29.2 | length 40
  Top Layer w0.254: DCDC4.19 128.545,36.755 128.55,36.75 128.55,37.405 ; DCDC4.20 128.55,37.405 ; DCDC4.21 127.495,38.08 128.54,38.08 128.55,38.07 128.55,37.405 ; 129.476,38.417 129.415,38.356 129.415,37.405 128.55,37.405 ; 132.207,41.656 132.273,41.722 LIM8.3@133.547,41.722 ; 132.27,43.497 132.395,43.622 LIM8.1@133.547,43.622 ; 132.334,45.212 132.727,45.605 C33.1 ; 132.715,39.37 R29.2 ; LIM8.3@133.007,41.706 LIM8.3@133.388,41.706
  Top Layer w0.5: 129.476,38.417 129.476,38.925 131.445,40.894 131.445,44.323 132.334,45.212 ; 129.921,39.37 132.715,39.37 134.62,37.465 137.16,37.465 139.065,39.37 143.637,39.37 145.072,37.935 POT11.1@145.072,37.642 ; 131.572,41.021 132.207,41.656 ; 131.572,42.799 132.27,43.497
NetC35_1: C35.1 LIM7.1 LIM7.3 R31.2 SW4A.2 SW4A.3 | length 34.1
  Top Layer w0.254: SW4A.2@114.3,38.476 115.057,38.476 115.57,38.989 ; SW4A.3 115.057,39.365 115.481,39.789 ; v1@118.199,54.521 v1(118.11,54.61) v1@118.225,54.725 ; C35.1 120.015,55.499 ; R31.2 121.92,55.499 ; LIM7.3@124.124,54.483 124.124,55.544 ; LIM7.1@126.024,54.483 126.024,55.586
  Top Layer w0.5: 115.57,38.989 115.57,39.751 118.11,42.291 v1(118.11,47.117) ; v1(118.11,54.61) 119.38,55.88 119.634,55.88 ; 120.015,55.499 119.634,55.88 ; 121.92,55.499 121.539,55.88 ; 124.119,55.586 123.825,55.88 ; 126.024,55.586 125.73,55.88 123.825,55.88 ; 119.634,55.88 121.539,55.88 ; 121.539,55.88 123.825,55.88
  Bottom Layer w0.5: 118.11,46.609 v1(118.11,47.117) v1(118.11,54.61)
NetDCDC1_1: DCDC1.1 DCDC1.4 L1.1 | length 9.3
  Top Layer w0.254: 121.368,96.519 121.876,96.519 DCDC1.4 ; 121.368,96.52 121.031,96.52 120.65,96.901 120.65,98.044 121.031,98.425 DCDC1.1 121.92,99.021
  Top Layer w0.5: 121.92,99.021 L1.1@121.92,103.707
NetDCDC1_15: DCDC1.15 R1.2 | length 2.2
  Top Layer w0.254: DCDC1.15 129.155,92.575 R1.2
NetDCDC1_16: DCDC1.16 R3.2 R42.1 | length 6
  Top Layer w0.254: DCDC1.16 131.045,93.225 R3.2 R42.1
NetDCDC1_23: DCDC1.23 DCDC1.24 L1.2 | length 9.4
  Top Layer w0.254: DCDC1.23 128.545,97.775 128.545,98.425 ; DCDC1.24 128.545,98.425 ; 127.508,99.098 127.555,99.145 128.545,99.145 128.545,98.425 ; L1.2@127.508,103.58 L1.2@127.715,103.787
  Top Layer w0.5: 127.508,99.098 L1.2@127.508,103.58
NetDCDC2_1: DCDC2.1 DCDC2.4 L2.1 | length 9.3
  Top Layer w0.254: DCDC2.4 121.076,125.05 120.65,125.476 120.65,126.619 121.031,127 DCDC2.1 121.92,127.635
  Top Layer w0.5: L2.1@121.666,132.155 121.92,131.901 121.92,127.635
NetDCDC2_15: DCDC2.15 R9.2 | length 2.2
  Top Layer w0.254: DCDC2.15 129.155,121.15 R9.2
NetDCDC2_16: DCDC2.16 R2.2 R41.1 | length 6
  Top Layer w0.254: DCDC2.16 131.045,121.8 R2.2 R41.1
NetDCDC2_23: DCDC2.23 DCDC2.24 L2.2 | length 9.8
  Top Layer w0.254: 127.461,127.56 128.55,127.55 128.55,127 ; DCDC2.23 128.55,126.35 128.55,127 ; DCDC2.24 128.55,127
  Top Layer w0.5: 127.461,127.56 L2.2@127.461,132.87
NetDCDC3_1: DCDC3.1 DCDC3.4 L3.1 | length 9.1
  Top Layer w0.254: 121.861,69.215 121.861,68.639 121.09,68.639 120.65,68.199 120.65,67.056 121.076,66.63 DCDC3.4
  Top Layer w0.5: 121.861,69.215 L3.1@121.861,73.755
NetDCDC3_15: DCDC3.15 R17.2 | length 2.2
  Top Layer w0.254: DCDC3.15 129.155,62.73 R17.2
NetDCDC3_16: DCDC3.16 R43.1 R46.2 | length 6
  Top Layer w0.254: DCDC3.16 131.045,63.38 R46.2 R43.1
NetDCDC3_23: DCDC3.23 DCDC3.24 L3.2 | length 9.6
  Top Layer w0.254: L3.2@127.449,73.628 L3.2@127.783,73.962 ; 127.454,69.21 128.61,69.21 128.63,69.19 128.63,68.62 128.63,67.92 ; DCDC3.23 128.62,67.93 ; DCDC3.24 128.59,68.58
  Top Layer w0.5: 127.449,69.215 L3.2@127.449,73.628
NetDCDC4_1: DCDC4.1 DCDC4.4 L4.1 | length 9
  Top Layer w0.254: DCDC4.4 121.076,38.055 120.65,38.481 120.65,39.624 121.031,40.005 DCDC4.1 121.92,40.64
  Top Layer w0.5: 121.92,40.64 L4.1@121.92,45.033
NetDCDC4_15: DCDC4.15 R25.2 | length 2.2
  Top Layer w0.254: DCDC4.15 129.155,34.155 R25.2
NetDCDC4_16: DCDC4.16 R5.2 R44.1 | length 6
  Top Layer w0.254: DCDC4.16 131.045,34.805 R5.2 R44.1
NetDCDC4_23: DCDC4.23 DCDC4.24 L4.2 | length 9.8
  Top Layer w0.254: DCDC4.23 128.635,39.355 128.64,39.35 128.64,39.99 ; DCDC4.24 128.625,40.005 128.64,39.99 ; 127.47,40.64 127.61,40.78 128.66,40.78 128.64,40.76 128.64,39.99
  Top Layer w0.5: L4.2@127.461,45.367 127.462,45.062 127.47,40.64
NetLIM1_5: LIM1.5 POT4.1 | length 16.1
  Top Layer w0.254: 125.095,109.613 LIM1.5
  Top Layer w0.5: POT4.1@115.549,102.444 115.13,102.863 115.13,105.986 117.398,108.254 123.736,108.254 125.095,109.613
NetLIM2_5: LIM2.5 POT6.1 | length 9.9
  Top Layer w0.254: LIM2.5@135.985,100.888 136.944,100.888
  Top Layer w0.5: 136.944,100.888 143.33,100.888 POT6.1@145.14,102.698
NetLIM3_5: LIM3.5 POT1.1 | length 16.4
  Top Layer w0.254: LIM3.5@124.879,139.312 125.095,139.096 125.095,138.176
  Top Layer w0.5: POT1.1 115.13,134.561 117.729,137.16 124.079,137.16 125.095,138.176
NetLIM4_5: LIM4.5 POT3.1 | length 9.9
  Top Layer w0.254: LIM4.5 136.906,129.54
  Top Layer w0.5: 136.906,129.54 143.165,129.54 POT3.1@144.975,131.35
NetLIM5_5: LIM5.5 POT7.1 | length 15.6
  Top Layer w0.254: 125.074,79.735 LIM5.5@125.074,80.658
  Top Layer w0.5: POT7.1 115.13,75.379 118.18,78.429 123.768,78.429 125.074,79.735
NetLIM6_5: LIM6.5 POT9.1 | length 9.9
  Top Layer w0.254: LIM6.5@136.112,71.158 137.071,71.158
  Top Layer w0.5: 137.071,71.158 143.457,71.158 POT9.1@145.267,72.968
NetLIM7_5: LIM7.5 POT10.1 | length 16.2
  Top Layer w0.254: 125.076,50.527 125.095,50.546 LIM7.5
  Top Layer w0.5: POT10.1@115.422,43.897 115.13,44.189 115.13,46.931 117.906,49.707 124.256,49.707 125.076,50.527
NetLIM8_5: LIM8.5 POT12.1 | length 9.8
  Top Layer w0.254: LIM8.5 136.906,42.672
  Top Layer w0.5: 136.906,42.672 143.153,42.672 POT12.1@144.886,44.405
NetPIC1_7: PIC1.7 R50.1 | length 2
  Top Layer w0.254: R50.1 91.555,133.35 PIC1.7
NetPIC2_7: PIC2.7 R51.1 | length 2
  Top Layer w0.254: R51.1 91.555,104.775 PIC2.7
NetPIC3_7: PIC3.7 R52.1 | length 2
  Top Layer w0.254: R52.1 91.555,74.93 PIC3.7
NetPIC4_7: PIC4.7 R53.1 | length 2
  Top Layer w0.254: R53.1 91.555,46.355 PIC4.7
NetPOT2_2: POT2.2 POT2.3 R41.2 | length 14.9
  Top Layer w0.254: R41.2 134.505,119.9
  Top Layer w0.5: 134.505,119.9 142.343,119.9 POT2.2@142.464,119.779 ; 138.811,119.888 139.924,121.001 POT2.3@139.924,124.859 ; POT2.3@139.827,124.508 POT2.3@140.051,124.732
NetPOT5_2: POT5.2 POT5.3 R42.2 | length 14.6
  Top Layer w0.254: R42.2 134.505,91.325
  Top Layer w0.5: 134.62,91.325 142.482,91.325 POT5.2 ; 138.823,91.325 140.119,92.621 POT5.3@140.119,96.189
NetPOT8_2: POT8.2 POT8.3 R43.2 | length 14.4
  Top Layer w0.254: R43.2 134.505,61.48
  Top Layer w0.5: 134.62,61.468 142.062,61.468 POT8.2@142.405,61.125 ; 138.811,61.468 140.081,62.738 140.081,65.989 POT8.3@139.865,66.205
NetPOT11_2: POT11.2 POT11.3 R44.2 | length 14.5
  Top Layer w0.254: R44.2 134.505,32.905
  Top Layer w0.5: 134.505,32.905 142.189,32.905 POT11.2@142.532,32.562 ; 138.88,32.962 139.992,34.074 POT11.3@139.992,37.642
NetR33_2: R33.2 SW1A.6 | length 1.8
  Top Layer w0.4: R33.2@109.843,124.46 SW1A.6
NetR34_1: R34.1 SW1B.6 | length 1.8
  Top Layer w0.4: R34.1 SW1B.6@111.697,118.128
NetR35_2: R35.2 SW2A.6 | length 1.7
  Top Layer w0.4: R35.2@109.949,95.885 SW2A.6
NetR36_1: R36.1 SW2B.6 | length 1.8
  Top Layer w0.4: R36.1@110.008,89.585 SW2B.6@111.765,89.585
NetR37_2: R37.2 SW3A.6 | length 1.8
  Top Layer w0.4: R37.2@109.843,66.04 SW3A.6
NetR38_1: R38.1 SW3B.6 | length 1.8
  Top Layer w0.4: R38.1 SW3B.6@111.727,59.69
NetR39_2: R39.2 SW4A.6 | length 1.8
  Top Layer w0.4: R39.2@109.843,37.465 SW4A.6
NetR40_1: R40.1 SW4B.6 | length 1.8
  Top Layer w0.4: R40.1@109.843,31.115 SW4B.6
OUT-A_3.3V: C18.1 J1.1 LIM3.6 pad.24 | length 35.3
  Top Layer w0.254: LIM3.6 126.746,139.135
  Top Layer w0.5: 126.873,139.065 142.367,139.065 144.272,137.16 pad.24
OUT-A_5V: C16.1 J2.1 LIM4.6 pad.25 | length 39.8
  Top Layer w0.254: C16.1@135.86,132.618 135.82,132.578 LIM4.6 136.84,130.49
  Top Layer w0.5: 136.84,130.49 137.795,131.445 137.795,133.35 139.065,134.62 145.796,134.62 147.32,133.096 147.32,124.587 149.352,122.555 pad.25
OUT-B_3.3V: C9.1 J3.1 LIM1.6 pad.26 | length 35.7
  Top Layer w0.254: LIM1.6 126.746,110.56
  Top Layer w0.5: 126.746,110.56 127.406,109.9 147.275,109.9 149.225,107.95 pad.26
OUT-B_5V: C7.1 J4.1 LIM2.6 pad.27 | length 39.2
  Top Layer w0.254: LIM2.6 136.84,101.915
  Top Layer w0.3: LIM2.6@135.928,101.838 135.928,102.539 ; 135.928,103.555 135.928,104.075
  Top Layer w0.5: 135.928,102.539 135.928,103.555 ; 136.84,101.915 137.795,102.87 137.795,104.14 139.065,105.41 145.669,105.41 147.32,103.759 147.32,95.377 149.352,93.345 pad.27
OUT-C_3.3V: C27.1 J5.1 LIM5.6 pad.28 | length 35.4
  Top Layer w0.254: LIM5.6 126.746,80.715
  Top Layer w0.5: 126.746,80.715 128.835,80.715 140.965,80.715 142.94,78.74 pad.28
OUT-C_5V: C25.1 J6.1 LIM6.6 pad.29 | length 38.3
  Top Layer w0.254: C25.1@135.89,74.18 135.82,74.11 LIM6.6 136.84,72.07
  Top Layer w0.5: 136.84,72.07 137.795,73.025 137.795,74.295 139.065,75.565 145.542,75.565 147.32,73.787 147.32,66.04 149.225,64.135 pad.29@160.528,64.135
OUT-D_3.3V: C36.1 J7.1 LIM7.6 pad.30 | length 35.7
  Top Layer w0.254: LIM7.6 126.746,52.14
  Top Layer w0.5: 126.746,52.14 128.835,52.14 138.8,52.14 141.41,49.53 J7.1 pad.30
OUT-D_5V: C34.1 J8.1 LIM8.6 pad.31 | length 39.3
  Top Layer w0.254: C34.1@135.89,45.605 135.82,45.535 LIM8.6 136.84,43.622
  Top Layer w0.5: 136.84,43.622 137.795,44.577 137.795,45.593 139.192,46.99 145.415,46.99 147.32,45.085 147.32,36.83 149.225,34.925 pad.31 ; pad.31@160.02,35.56 pad.31@160.655,35.56
PWM2: PIN1.13
PWM3: PIN1.14
PWM4: PIN1.11
PWM5: PIN1.12
PWM6: PIN1.9
PWM7: PIN1.10
PWM8: PIN1.7
PWM9: PIN1.8
PWM10: PIN1.5
PWM11: PIN1.6
PWM12: PIN1.3
PWM13: PIN1.4
RST: PIN1.2
SCK: PIN2.15
SS: PIN2.16
VIN: PIN2.33
pads on no net: DCDC1.2@124.695,94.85 DCDC1.9 DCDC1.10 DCDC1.13 DCDC1.17 DCDC1.22 DCDC2.2@124.695,123.425 DCDC2.9 DCDC2.10 DCDC2.13 DCDC2.17 DCDC2.22 DCDC3.2@124.695,65.005 DCDC3.9 DCDC3.10 DCDC3.13 DCDC3.17 DCDC3.22 DCDC4.2@124.695,36.43 DCDC4.9 DCDC4.10 DCDC4.13 DCDC4.17 DCDC4.22 PIN2.38 PIN2.40
copper on no net: | length 3
  Top Layer w0.254: -97.447,51.303 -94.495,51.303

## Polygon pours and split planes (outlines as drawn)
GND on Top Layer "Top Layer-No Net" (solid, remove dead copper, pour order 2): 68.58,142.875 71.12,145.415 175.26,145.415 177.8,142.875 177.8,28.575 175.26,26.035 71.12,26.035 68.58,28.575 68.58,142.875
GND on Bottom Layer "Top Layer-No Net" (solid, remove dead copper, pour order 4): 68.58,142.875 71.12,145.415 175.26,145.415 177.8,142.875 177.8,28.575 175.26,26.035 71.12,26.035 68.58,28.575 68.58,142.875

## Silkscreen, mask and mechanical layers (free items; w line width, h text height)
Top Overlay:
  lines w0.254: 104.775,34.925 105.41,34.925 105.41,32.515 ; 104.775,37.465 105.41,37.465 105.41,39.875 ; 104.775,63.5 105.41,63.5 105.41,61.09 ; 104.775,66.04 105.41,66.04 105.41,68.45 ; 104.775,93.345 105.41,93.345 105.41,90.935 ; 104.775,95.885 105.41,95.885 105.41,98.295 ; 104.775,121.92 105.41,121.92 105.41,119.51 ; 104.775,124.46 105.41,124.46 105.41,126.87 ; 167.64,79.883 167.64,81.915 163.83,85.725 155.448,85.725 152.4,85.725 148.59,81.915 148.59,80.01 148.59,62.865 148.59,60.96 152.4,57.15 163.83,57.15 167.64,60.96 167.64,62.865 167.64,80.01 ; 107.315,27.94 88.9,27.94 88.9,56.515 107.315,56.515 ; 107.315,27.94 107.315,56.515 ; 107.315,27.94 146.558,27.94 147.955,27.94 147.955,53.34 147.955,56.515 107.315,56.515 ; 107.315,57.15 88.9,57.15 88.9,85.725 107.315,85.725 ; 107.315,57.15 107.315,85.725 ; 107.315,57.15 146.177,57.15 147.955,57.15 147.955,85.725 107.315,85.725 ; 107.315,86.36 88.9,86.36 88.9,114.935 107.315,114.935 ; 107.315,86.36 107.315,114.935 ; 107.315,86.36 147.955,86.36 147.955,114.935 107.315,114.935 ; 107.315,115.57 88.9,115.57 88.9,143.51 107.315,143.51 ; 107.315,115.57 147.955,115.57 147.955,143.51 107.315,143.51 ; 107.315,115.57 107.315,143.51 ; 73.66,37.465 73.66,45.085 76.835,48.26 84.455,48.26 87.63,45.085 87.63,37.465 84.455,34.29 76.835,34.29 73.66,37.465 ; 73.66,52.07 73.66,59.69 76.835,62.865 84.455,62.865 87.63,59.69 87.63,52.07 84.455,48.895 76.835,48.895 73.66,52.07 ; 73.66,66.675 73.66,74.295 76.835,77.47 84.455,77.47 87.63,74.295 87.63,66.675 84.455,63.5 76.835,63.5 73.66,66.675 ; 148.59,31.75 152.4,27.94 163.83,27.94 167.64,31.75 167.64,34.544 167.64,52.705 163.83,56.515 152.4,56.515 148.59,52.705 148.59,50.8 148.59,33.655 148.59,31.75 ; 148.59,90.17 152.4,86.36 163.83,86.36 167.64,90.17 167.64,92.075 167.64,109.22 167.64,111.125 163.83,114.935 163.703,114.935 152.4,114.935 148.59,111.125 148.59,110.998 148.59,110.49 148.59,109.22 148.59,92.075 148.59,90.17 ; 148.59,119.38 152.4,115.57 154.305,115.57 163.83,115.57 167.64,119.38 167.64,121.285 167.64,138.43 167.64,139.7 163.195,144.145 154.432,144.145 152.4,144.145 148.59,140.335 148.59,138.43 148.59,121.285 148.59,119.38
  text "UPCNSL-ABS-FLS-POL_test-v1.0" at 71.12,134.62 h2 r270
  text "3.3V" at 149.86,134.112 h1
  text "OUT: A" at 149.86,129.413 h1
  text "5V" at 149.86,124.587 h1
  text "3.3V" at 95.25,123.825 h1
  text "5V" at 97.155,121.285 h1
  text "IN: A" at 93.98,120.65 h1 r90
  text "3.3V" at 149.86,104.902 h1
  text "OUT: B" at 149.86,100.203 h1
  text "5V" at 149.86,95.377 h1
  text "3.3V" at 95.25,95.25 h1
  text "5V" at 97.155,92.71 h1
  text "IN: B" at 93.98,92.075 h1 r90
  text "3.3V" at 149.86,75.692 h1
  text "OUT: C" at 149.86,70.993 h1
  text "GND" at 73.025,68.58 h1 r90
  text "5V" at 149.86,66.167 h1
  text "3.3V" at 95.25,65.405 h1
  text "5V" at 97.155,62.865 h1
  text "IN: C" at 93.98,62.23 h1 r90
  text "3.3V" at 73.025,53.975 h1 r90
  text "3.3V" at 149.86,46.482 h1
  text "OUT: D" at 149.86,41.783 h1
  text "5V" at 73.025,40.64 h1 r90
  text "3.3V" at 95.25,36.957 h1
  text "5V" at 149.86,36.957 h1
  text "5V" at 97.155,34.417 h1
  text "IN: D" at 93.98,33.655 h1 r90
Mechanical 1:
  lines w2: 67.58,28.575 ccw(c68.58,28.575) 67.874,27.867 ; 67.58,28.575 ccw(c68.58,28.575) 67.873,27.868 67.874,27.867 ; 67.58,28.575 67.58,142.875 ; 67.58,142.875 cw(c68.58,142.875) 67.873,143.582 ; 67.58,142.875 cw(c68.58,142.875) 67.873,143.582 ; 67.873,143.582 70.413,146.122 ; 67.874,27.867 70.412,25.329 ; 70.412,25.329 ccw(c71.12,26.035) 71.12,25.035 ; 70.412,25.329 70.413,25.328 ccw(c71.12,26.035) 71.12,25.035 ; 70.413,146.122 cw(c71.12,145.415) 71.12,146.415 ; 70.413,146.122 cw(c71.12,145.415) 71.12,146.415 ; 71.12,25.035 175.26,25.035 ; 71.12,146.415 175.26,146.415 ; 175.26,25.035 ccw(c175.26,26.035) 175.967,25.328 ; 175.26,25.035 ccw(c175.26,26.035) 175.967,25.328 ; 175.26,146.415 cw(c175.26,145.415) 175.968,146.121 ; 175.26,146.415 cw(c175.26,145.415) 175.967,146.122 175.968,146.121 ; 175.967,25.328 178.507,27.868 ; 175.968,146.121 178.506,143.583 ; 178.506,143.583 cw(c177.8,142.875) 178.8,142.875 ; 178.506,143.583 178.507,143.582 cw(c177.8,142.875) 178.8,142.875 ; 178.507,27.868 ccw(c177.8,28.575) 178.8,28.575 ; 178.507,27.868 ccw(c177.8,28.575) 178.8,28.575 ; 178.8,28.575 178.8,142.875